# EAGLE board ph-rel (EAGLE 5.07)
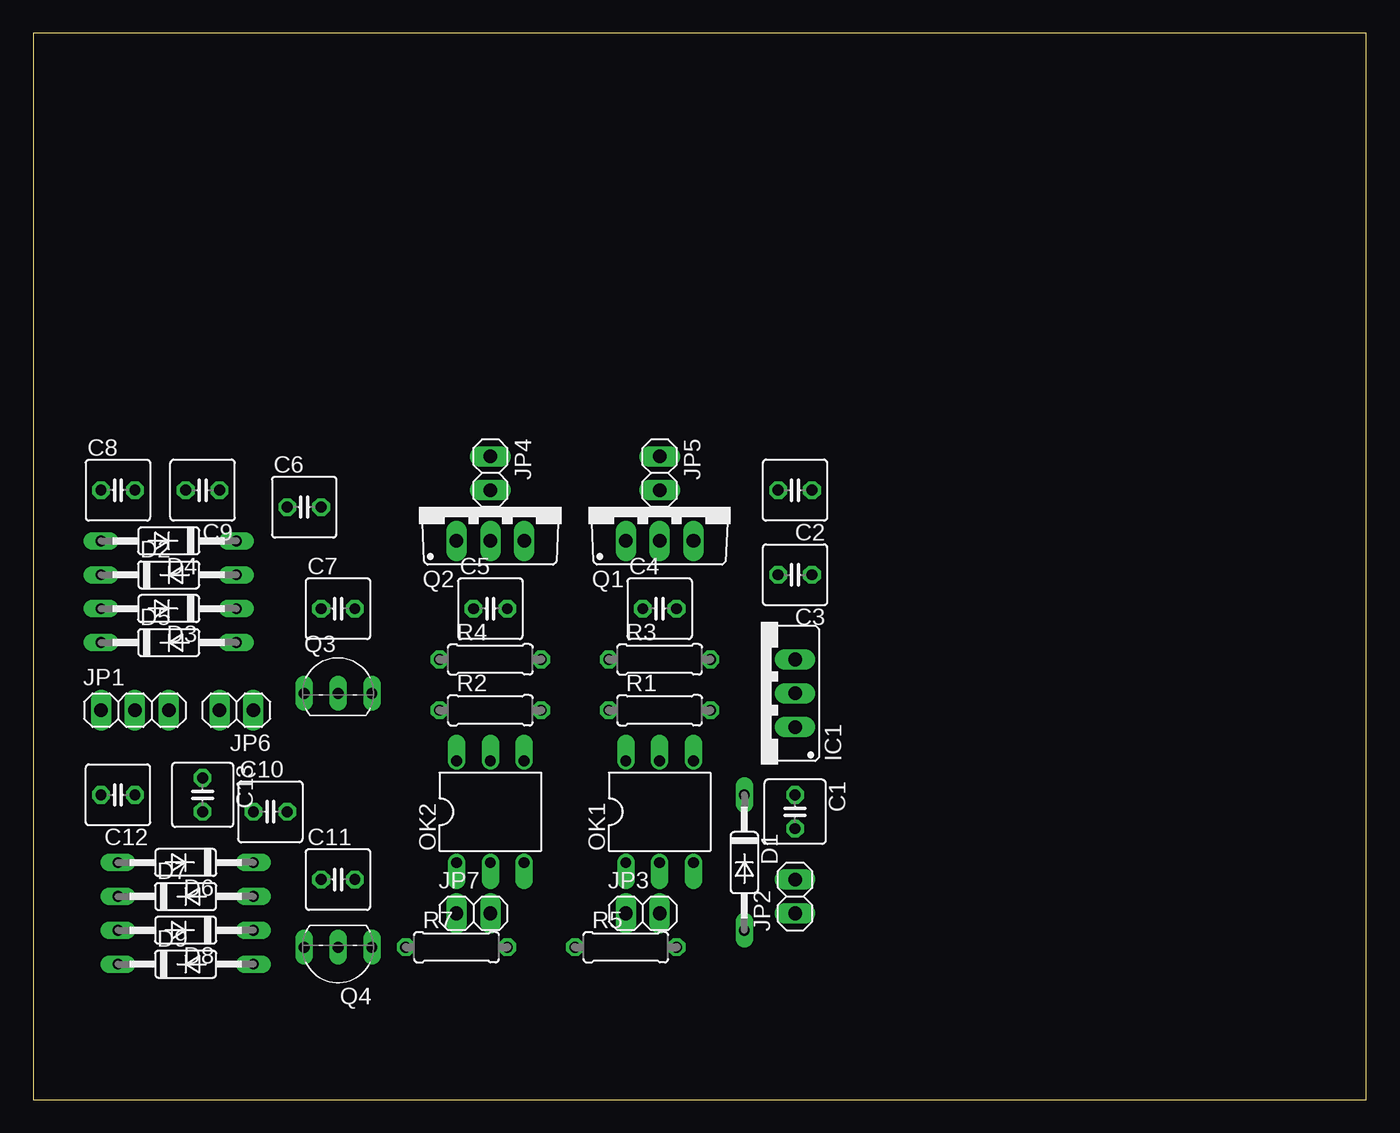
[diagram p0: board, top side]
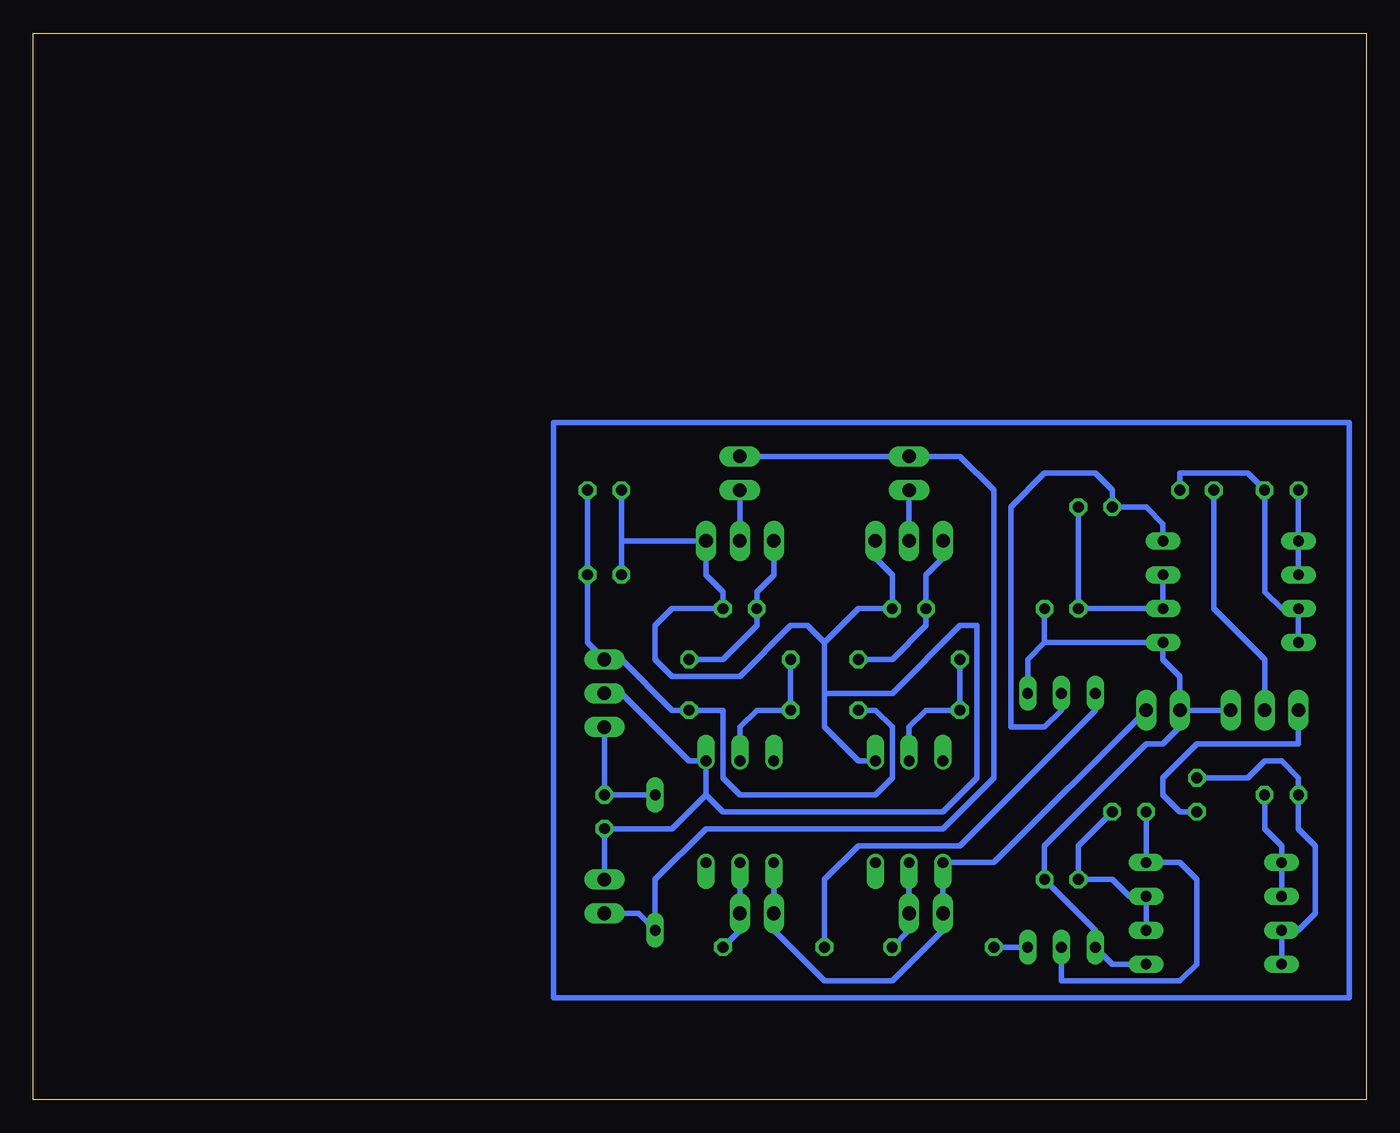
[diagram p1: board, bottom side, seen from below]

Size 100 x 80 mm. Coordinates in mm from the lower left corner, seen from the top.
Outline: 0,0 100,0 100,80 0,80 0,0
Copper layers (1*16): Top 0.0356mm / dielectric 1.5011mm / Bottom 0.0356mm
Design rules "default": minimum track width 7mil, minimum drill 14mil, track to track 7mil, track to pad 7mil, pad to pad 7mil, via to via 7mil, smd to smd 0mil, copper to edge 20mil, drill to drill 8mil, minimum pad ring 10mil, minimum via ring 8mil, stop-mask expansion 4mil, vias tented up to drill 0mil, thermal gap 10mil

## Footprints (pad centres in the part's own frame; a part is rotated, then mirrored left to right if it is on the bottom)
C025-050X050 = drill 0.813 octagon: 1 -1.27,0; 2 1.27,0
DO35-10 = drill 0.813 long: A 5.08,0; C -5.08,0
78XXS = drill 1.016 long: GND 0,-2.54; IN -2.54,-2.54; OUT 2.54,-2.54
1X03 = drill 1.016 long: 1 -2.54,0; 2 0,0; 3 2.54,0
1X02 = drill 1.016 long: 1 -1.27,0; 2 1.27,0
DIL06 = drill 0.813 offset: 1 -2.54,-3.81; 2 0,-3.81; 3 2.54,-3.81; 4 2.54,3.81; 5 0,3.81; 6 -2.54,3.81
TO220BV = drill 1.016 long: D 0,-2.54; G -2.54,-2.54; S 2.54,-2.54
TO92-EBC = drill 0.813 long: B 0,-1.27; C -2.54,-1.27; E 2.54,-1.27
0207/7 = drill 0.813 octagon: 1 -3.81,0; 2 3.81,0

## Placement (x,y rotation side)
C1  [C025-050X050]  57.15,21.59 270 top
C2  [C025-050X050]  57.15,45.72 180 top
C3  [C025-050X050]  57.15,39.37 180 top
C4  [C025-050X050]  46.99,36.83 0 top
C5  [C025-050X050]  34.29,36.83 0 top
C6  [C025-050X050]  20.32,44.45 0 top
C7  [C025-050X050]  22.86,36.83 0 top
C8  [C025-050X050]  6.35,45.72 0 top
C9  [C025-050X050]  12.7,45.72 180 top
C10  [C025-050X050]  17.78,21.59 0 top
C11  [C025-050X050]  22.86,16.51 0 top
C12  [C025-050X050]  6.35,22.86 180 top
C13  [C025-050X050]  12.7,22.86 270 top
D1  1N4148DO35-10  [DO35-10]  53.34,17.78 270 top
D2  1N4148DO35-10  [DO35-10]  10.16,39.37 0 top
D3  1N4148DO35-10  [DO35-10]  10.16,36.83 180 top
D4  1N4148DO35-10  [DO35-10]  10.16,41.91 180 top
D5  1N4148DO35-10  [DO35-10]  10.16,34.29 0 top
D6  1N4148DO35-10  [DO35-10]  11.43,17.78 180 top
D7  1N4148DO35-10  [DO35-10]  11.43,15.24 0 top
D8  1N4148DO35-10  [DO35-10]  11.43,12.7 180 top
D9  1N4148DO35-10  [DO35-10]  11.43,10.16 0 top
IC1  [78XXS]  54.61,30.48 90 top
JP1  [1X03]  7.62,29.21 0 top
JP2  [1X02]  57.15,15.24 90 top
JP3  [1X02]  45.72,13.97 0 top
JP4  [1X02]  34.29,46.99 270 top
JP5  [1X02]  46.99,46.99 270 top
JP6  [1X02]  15.24,29.21 180 top
JP7  [1X02]  33.02,13.97 0 top
OK1  4N25M  [DIL06]  46.99,21.59 0 top
OK2  4N25M  [DIL06]  34.29,21.59 0 top
Q1  IRF740  [TO220BV]  46.99,44.45 0 top
Q2  IRF740  [TO220BV]  34.29,44.45 0 top
Q3  BC546B  [TO92-EBC]  22.86,31.75 0 top
Q4  BC546B  [TO92-EBC]  22.86,10.16 180 top
R1  [0207/7]  46.99,29.21 0 top
R2  [0207/7]  34.29,29.21 0 top
R3  [0207/7]  46.99,33.02 0 top
R4  [0207/7]  34.29,33.02 0 top
R5  [0207/7]  44.45,11.43 0 top
R7  [0207/7]  31.75,11.43 0 top

## Library data of the parts
C1-C13 R1-R5 R7 = rcl
D1-D9 = diode
IC1 = v-reg
JP1-JP7 = pinhead
OK1 OK2 = optocoupler
Q1 Q2 = transistor-power
Q3 Q4 = transistor-npn

## Nets
N$1: OK1.5 R1.1 R3.1
N$2: C8.1 D2.C D4.A
N$3: C6.2 C7.1 D2.A D3.C
N$4: C4.1 Q1.G R3.2
N$5: D1.A JP2.1 JP4.1 JP5.1
N$6: C5.1 Q2.G R4.2
N$7: C2.1 C3.1 IC1.OUT R1.2 R2.2
N$8: JP3.2 OK1.2 R5.2
N$9: JP3.1 JP6.1 JP7.1 OK1.1 OK2.1
N$10: JP7.2 OK2.2 R7.2
N$11: C1.1 D1.C IC1.IN
N$12: OK2.5 R2.1 R4.1
N$13: JP5.2 Q1.D
N$14: C1.2 C2.2 C3.2 C4.2 C5.2 IC1.GND JP2.2 OK1.4 OK2.4 Q1.S Q2.S
N$15: JP4.2 Q2.D
N$16: C8.2 C9.1 D3.A D5.C
N$17: C12.1 D6.A D7.C
N$18: C10.2 C11.1 D7.A D8.C
N$19: Q3.C R5.1
N$20: Q4.C R7.1
N$21: C6.1 D4.C Q3.B
N$23: C12.2 C13.1 D8.A D9.C
N$24: C7.2 C11.2 D5.A D9.A JP1.3 JP6.2 Q3.E Q4.E
N$26: C9.2 JP1.2
N$27: C10.1 D6.C Q4.B
N$31: C13.2 JP1.1

## Tracks (layer width: path | path; a pad name or v marks a point on that pad's centre or on a via)
N$1
  Bottom 0.406: R3.1 R1.1 45.72,29.21 46.99,27.94 OK1.5
N$2
  Bottom 0.406: D2.C D4.A C8.1
N$3
  Bottom 0.406: C6.2 C7.1 D3.C D2.A
N$4
  Bottom 0.406: Q1.G 44.45,39.37 45.72,38.1 C4.1 45.72,35.56 48.26,33.02 R3.2
N$5
  Bottom 0.406: JP5.1 JP4.1 30.48,48.26 27.94,45.72 27.94,24.13 31.75,20.32 49.53,20.32 53.34,16.51 D1.A 54.61,13.97 JP2.1
N$6
  Bottom 0.406: Q2.G 31.75,40.64 33.02,39.37 C5.1 33.02,35.56 35.56,33.02 R4.2
N$7
  Bottom 0.406: C2.1 C3.1 58.42,34.29 IC1.OUT 55.88,33.02 52.07,29.21 R1.2 48.26,29.21 48.26,24.13 46.99,22.86 36.83,22.86 35.56,24.13 35.56,27.94 36.83,29.21 R2.2
N$8
  Bottom 0.406: OK1.2 JP3.2 46.99,12.7 R5.2
N$9
  Bottom 0.406: JP6.1 27.94,17.78 OK2.1 JP7.1 31.75,12.7 35.56,8.89 40.64,8.89 44.45,12.7 OK1.1 JP3.1
N$10
  Bottom 0.406: R7.2 34.29,12.7 JP7.2 OK2.2
N$11
  Bottom 0.406: IC1.IN C1.1 D1.C
N$12
  Bottom 0.406: R4.1 R2.1 33.02,29.21 34.29,27.94 OK2.5
N$13
  Bottom 0.406: Q1.D JP5.2
N$14
  Bottom 0.406: 55.88,41.91 C3.2 | 55.88,41.91 C2.2 | 55.88,41.91 Q1.S 49.53,39.37 48.26,38.1 C4.2 52.07,36.83 53.34,35.56 53.34,33.02 52.07,31.75 46.99,31.75 43.18,35.56 41.91,35.56 40.64,34.29 | JP2.2 C1.2 52.07,20.32 49.53,22.86 | 49.53,22.86 OK1.4 50.8,25.4 55.88,30.48 IC1.GND | Q2.S 36.83,40.64 35.56,39.37 C5.2 38.1,36.83 40.64,34.29 | 40.64,30.48 40.64,27.94 38.1,25.4 OK2.4 | 40.64,30.48 40.64,34.29 | 40.64,30.48 35.56,30.48 30.48,35.56 29.21,35.56 29.21,24.13 31.75,21.59 48.26,21.59 49.53,22.86
N$15
  Bottom 0.406: Q2.D JP4.2
N$16
  Bottom 0.406: D5.C D3.A 6.35,36.83 7.62,38.1 C8.2 8.89,46.99 13.97,46.99 C9.1
N$17
  Bottom 0.406: C12.1 7.62,20.32 6.35,19.05 D6.A D7.C
N$18
  Bottom 0.406: D8.C D7.A 17.78,15.24 19.05,16.51 C11.1 21.59,19.05 C10.2
N$19
  Bottom 0.406: Q3.C 20.32,29.21 30.48,19.05 38.1,19.05 40.64,16.51 R5.1
N$20
  Bottom 0.406: Q4.C R7.1
N$21
  Bottom 0.406: D4.C 15.24,43.18 16.51,44.45 C6.1 19.05,45.72 20.32,46.99 24.13,46.99 26.67,44.45 26.67,27.94 24.13,27.94 22.86,29.21 Q3.B
N$22
  Bottom 0.406: 1.27,50.8 60.96,50.8 60.96,7.62 1.27,7.62 1.27,50.8
N$23
  Bottom 0.406: C13.1 8.89,24.13 7.62,25.4 6.35,25.4 5.08,24.13 C12.2 5.08,20.32 3.81,19.05 3.81,13.97 5.08,12.7 D8.A D9.C
N$24
  Bottom 0.406: 24.13,34.29 C7.2 | JP6.2 13.97,31.75 15.24,33.02 D5.A 24.13,34.29 | JP6.2 JP1.3 | D9.A 19.05,10.16 Q4.E 20.32,12.7 C11.2 24.13,19.05 16.51,26.67 15.24,26.67 13.97,27.94 JP6.2 | Q3.E 25.4,33.02 24.13,34.29
N$26
  Bottom 0.406: C9.2 11.43,36.83 7.62,33.02 JP1.2
N$27
  Bottom 0.406: Q4.B 22.86,8.89 13.97,8.89 12.7,10.16 12.7,16.51 13.97,17.78 D6.C C10.1
N$31
  Bottom 0.406: JP1.1 5.08,26.67 12.7,26.67 15.24,24.13 15.24,22.86 13.97,21.59 C13.2